# Altium PCB Transmitter - BlackChat.PcbDoc
Units mil, origin at the board's own origin, x right, y up, seen from the top; angles counter-clockwise.
Board outline 1080 x 950 mil, 2 copper layers (Top Layer, Bottom Layer); 17 components, 12 nets, 40 pads, 8 vias.
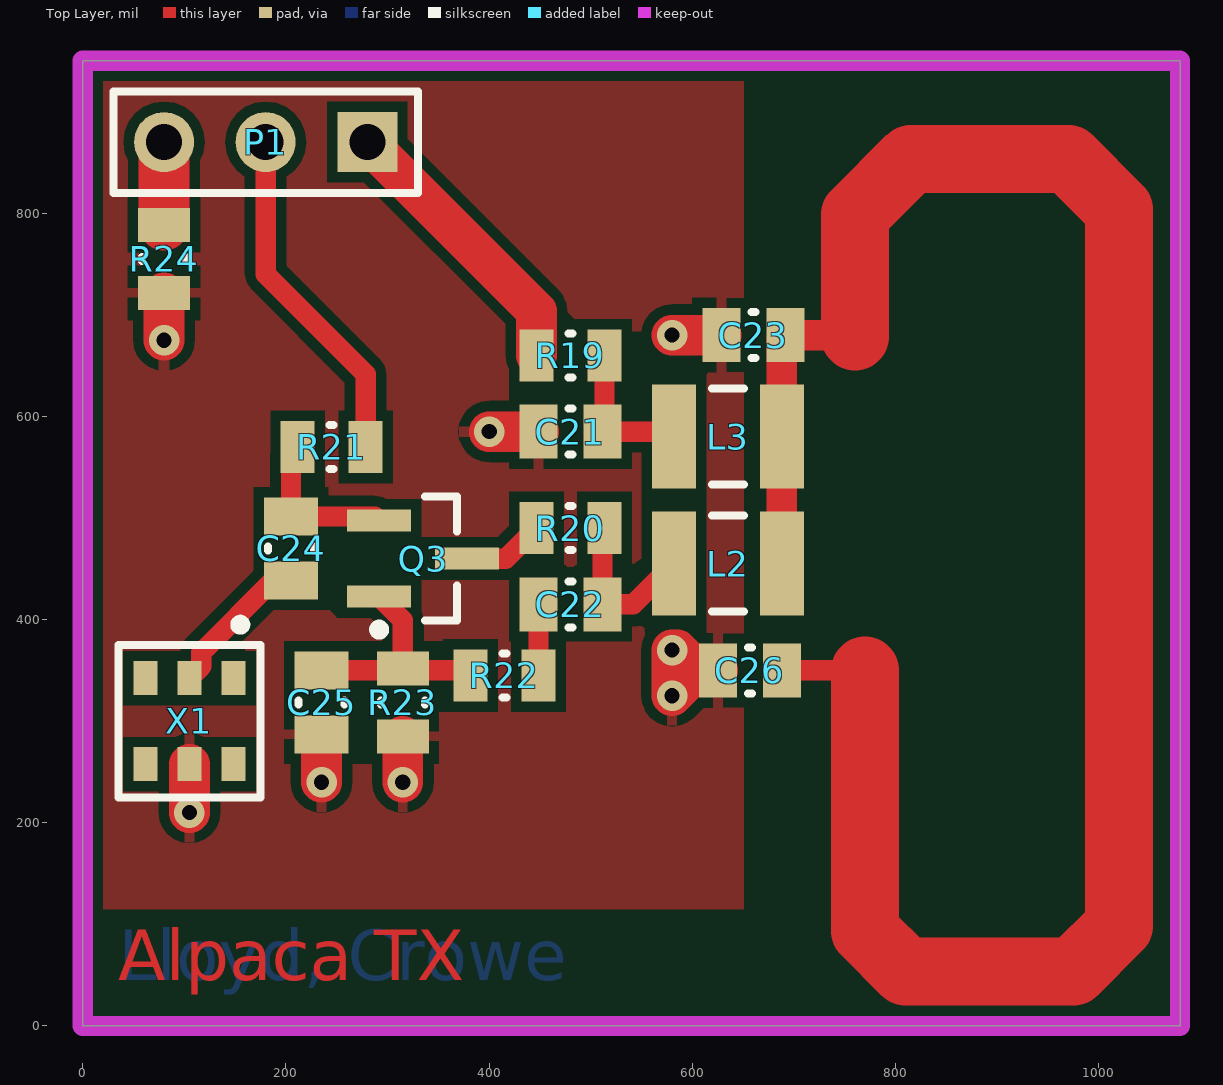
[diagram p0: Top Layer view]
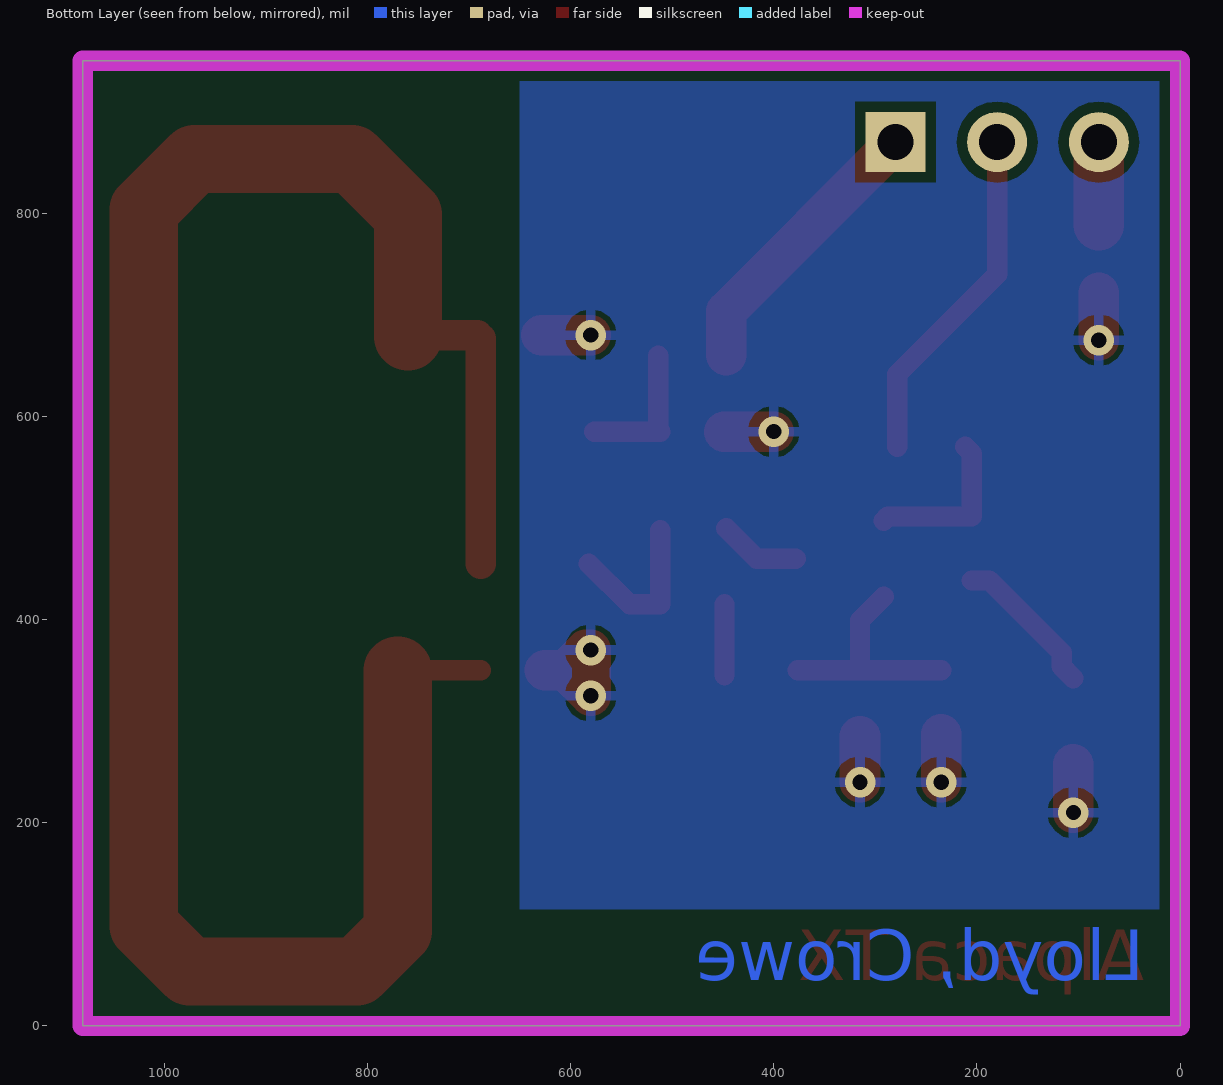
[diagram p1: Bottom Layer view, seen from below]

## Layer stack, top to bottom
Top Layer: signal copper 1.4
Dielectric: dielectric 12.6, FR-4, Dk 4.8
Bottom Layer: signal copper 1.4

## Board outline
0,0 0,950 1080,950 1080,0

## Design rules (kind name [scope] priority, off if disabled: settings)
Clearance [All] p1: gap=10
Length All [All] p1: maxlimit=1969 minlimit=1969
PolygonConnect [All] p1: connectstyle=Relief reliefconductorwidth=10 reliefentries=4 polygonreliefangle="90 Angle" airgapwidth=10
RoutingVias [All] p1: holewidth=28 width=50 viastyle="Through Hole" minholewidth=28 minwidth=50 maxholewidth=28 maxwidth=50
SolderMaskExpansion [All] p1: expansion=4
Width [All] p1: maxlimit=120 minlimit=10 preferedwidth=10 bottomlayer_maxwidth=10 minimp=50.000000 maximp=50.000000 favimp=50.000000
28 further rules are at their usual default settings.

## Components (designator, comment, footprint, x,y, rotation, side; value= is the part's Value field where it differs from the comment)
C21 "CAP 1nF 16V 0805(2012)" CAPC0805(2012)100_L 480,585 r0 top
C22 "CAP 1.8pF 16V 0805(2012)" CAPC0805(2012)75_L 480,415 r0 top
C23 "CAP 3.9pF 16V 0805(2012)" CAPC0805(2012)75_L 660,680 r0 top
C24 "CAP 47pF 16V 0805(2012)" CAPC0805(2012)100_L 205,470 r90 top
C25 "CAP 10pF 16V 0805(2012)" CAPC0805(2012)100_L 235,318.5 r90 top
C26 "CAP 2.2pF 16V 0805(2012)" CAPC0805(2012)75_L 656.5,350 r180 top
L2 "39nH" C1210 635,455 r0 top
L3 "1uH" C1210 635,580 r0 top
P1 "Header 3" HDR1X3 280,870 r180 top
Q3 "NE68033" SOT95P275X120-3N 335,460 r0 top
R19 "22R 5% 0805(2012)" RESC0805(2012)_L 480,660 r180 top
R20 "10R 5% 0805(2012)" RESC0805(2012)_L 480,490 r0 top
R21 "33K 1% 0805(2012)" RESC0805(2012)_L 245,570 r0 top
R22 "22R 5% 0805(2012)" RESC0805(2012)_L 415,345 r0 top
R23 "47R 5% 0805(2012)" RESC0805(2012)_L 315,318.5 r90 top
R24 "Jumper 0805(2012)" RESC0805(2012)_L 80,755 r270 top
X1 "RO3101E" RO3101E 105,300 r270 top

## Footprints (in the part's own frame and the unit in brackets; to place one, negate y for a bottom-side part, rotate by r counter-clockwise, add the part's x,y. Pads: shape width x height; smd on the part's side, far side on the other; paste and mask are expansions set on the pad)
C1210 [mm] "Chip Capacitor, Body 3.2x2.5mm, IPC High Density"
  rect 1.1x2.6 smd: 1(-1.35,0) 2(1.35,0)
  silkscreen extent -0.4,-1.2 0.4,1.2, body extent -1.7,-1.35 1.7,1.35, height 1.3
CAPC0805(2012)75_L [mm] "Chip Capacitor, Body 2.0x1.2mm, Height 0.75mm, IPC High Density"
  rect 0.95x1.35 smd: 1(-0.8,0) 2(0.8,0)
  silkscreen extent -0.05,-0.58 0.05,0.58, body extent -1.1,-0.72 1.1,0.72, height 0.75
CAPC0805(2012)100_L [mm] "Chip Capacitor, Body 2.0x1.2mm, Height 1.0mm, IPC High Density"
  rect 0.95x1.35 smd: 1(-0.8,0) 2(0.8,0)
  silkscreen extent -0.05,-0.58 0.05,0.58, body extent -1.1,-0.72 1.1,0.72, height 1
HDR1X3 [mm] "Connector; Header; 3 Position"
  rect 1.5x1.5 hole 0.9: 1(0,0)
  round 1.5 hole 0.9: 2(2.54,0) 3(5.08,0)
  silkscreen extent -1.27,-1.27 6.35,1.27
RESC0805(2012)_L [mm] "Chip Resistor, Body 2.0x1.3mm, IPC High Density"
  rect 0.85x1.3 smd: 1(-0.85,0) 2(0.85,0)
  silkscreen extent -0.05,-0.55 0.05,0.55, body extent -1.1,-0.67 1.1,0.68, height 0.7
RO3101E [mm] "433.92 MHz  SAW  Resonator"
  rect 0.85x0.6 smd: 1(-1.075,1.1) 2(-1.075,0) 3(-1.075,-1.1) 4(1.075,-1.1) 5(1.075,0) 6(1.075,1.1)
  silkscreen extent -2.54,-1.78 1.91,1.78, body extent -1.65,-1.52 1.65,1.52, height 1.25
SOT95P275X120-3N [mm] "SOT23, 3-Leads, Body 2.90x2.75mm, Pitch 0.95mm, IPC Medium Density"
  rect 1.6x0.55 smd: 1(-1.1,-0.95) 2(-1.1,0.95) 3(1.1,0)
  silkscreen extent -1.22,-1.9 0.85,1.55, body extent -0.85,-1.55 0.85,1.55, height 1.2

## Part data
C21: library part CMP-1036-02955-1, "CAP 1nF 16V ±1% 0805 (2012 Metric) Thickness 1mm SMD"
C22: library part CMP-1036-00213-1, "CAP 1.8pF 16V ±0.1pF 0805 (2012 Metric) Thickness 0.75mm SMD"
C23: library part CMP-1036-00461-1, "CAP 3.9pF 16V ±0.1pF 0805 (2012 Metric) Thickness 0.75mm SMD"
C24: library part CMP-1036-01589-1, "CAP 47pF 16V ±0.5pF 0805 (2012 Metric) Thickness 1mm SMD"
C25: library part CMP-1036-00830-1, "CAP 10pF 16V ±0.25pF 0805 (2012 Metric) Thickness 1mm SMD"
C26: library part CMP-1036-00267-1, "CAP 2.2pF 16V ±0.1pF 0805 (2012 Metric) Thickness 0.75mm SMD"
L2 L3: library part Inductor, "Generic Inductor"
P1: "Header, 3-Pin"
Q3: "NPN SILICON HIGH FREQUENCY TRANSISTOR"
R19 R22: library part CMP-1013-00034-1, "22R 0.125W 5% 0805 (2012 Metric)  SMD"
R20: library part CMP-1013-00026-1, "10R 0.125W 5% 0805 (2012 Metric)  SMD"
R21: library part CMP-1013-00680-1, "33K 0.125W 1% 0805 (2012 Metric)  SMD"
R23: library part CMP-1013-00042-1, "47R 0.125W 5% 0805 (2012 Metric)  SMD"
R24: library part CMP-1013-00001-1, "Jumper 0805 (2012 Metric)"
X1: "433.92 MHz  SAW  Resonator"

## Via types
v1: diameter 30, hole 15, Top Layer to Bottom Layer, 8 vias

## Nets (pads, with @x,y where several pads share a name; then routed paths per layer and width w, separated by ;. In a path a pad name is that pad's centre, name@x,y a point inside that pad or via, vN(x,y) a via of type N, cw(c..) or ccw(c..) an arc to the next point about the centre after c; other vN are vias at no path point)
3V3: P1.1 R19.2 | length 279
  Top Layer w40: P1.1 446.54,703.46 R19.2
AGND: C21.1 C23.1 C25.1 C26.2 R23.1 R24.2 X1.5 | length 416.9
  Top Layer w40: v1(80,675) R24.2 ; v1(105,210) X1.5 ; v1(235,240) C25.1 ; v1(315,240) R23.1 ; v1(400,585) C21.1 ; v1(580,680) C23.1 ; C26.2 605,350 ; 605,350 v1(580,325) v1(580,370) 585,370 605,350
ANTENNA: C23.2 C26.1 L2.2 L3.2 | length 2040.9
  Top Layer w20: C26.1 770,350
  Top Layer w30: L2.2 L3.2 C23.2@688.15,676.65 ; C23.2 758.5,680
  Top Layer w67: 760,678.5 760,798.5 815,853.5 970,853.5 1020,803.5 1020,98.5 975,53.5 810,53.5 770,93.5 770,350
DATA_TX: P1.2 R21.2 | length 340.8
  Top Layer w20: P1.2 180,740 278.46,641.54 R21.2
DGND: P1.3 R24.1 | length 81.5
  Top Layer w50: R24.1 P1.3
NetC21_2: C21.2 L3.1 R19.1 | length 138.4
  Top Layer w20: C21.2 L3.1@576.85,585 ; C21.2@513.46,586.97 R19.1
NetC22_1: C22.1 R22.2 | length 70
  Top Layer w20: R22.2 C22.1
NetC22_2: C22.2 L2.1 R20.2 | length 160
  Top Layer w20: R20.2@511.5,488.03 C22.2 541.85,415 L2.1
NetC24_1: C24.1 X1.2 | length 147.8
  Top Layer w20: X1.2 116.5,353.82 116.5,367.34 187.66,438.5 C24.1
NetC24_2: C24.2 Q3.2 R21.1 | length 159.6
  Top Layer w20: R21.1 205,563.46 C24.2 287.6,501.5 Q3.2
NetC25_2: C25.2 Q3.1 R22.1 R23.2 | length 221.8
  Top Layer w20: C25.2 R22.1@376.54,350 ; Q3.1 315,399.29 R23.2
NetQ3_3: Q3.3 R20.1 | length 80.7
  Top Layer w20: Q3.3 416.54,460 R20.1
pads on no net: X1.1 X1.3 X1.4 X1.6

## Polygon pours and split planes (outlines as drawn)
AGND on Bottom Layer "Ground Plane" (solid, remove dead copper, pour order 4): 0,950.5 0,115 650,115 650,950.5
AGND on Top Layer "Ground Plane" (solid, remove dead copper, pour order 3): 0.6,950.93 0.6,115 650.41,115 650.41,950.93

## Keep-outs
Keep-Out Layer:
  the board outline again, w20

## Other copper
Top Layer:
  text "Alpaca TX" at 35,45 h50
Bottom Layer:
  text "Lloyd, Crowe" at 35,45 h50